# Altium PCB Плата_часов.PcbDoc
Units mm, origin at the board's own origin, x right, y up, seen from the top; angles counter-clockwise.
Board outline 98 x 35 mm, 4 copper layers (Top Layer, Layer 1, Layer 2, Bottom Layer), stack 0.603 mm thick; 69 components, 89 nets, 275 pads, 70 vias.
Unrouted connection lines stored in the file: 53.
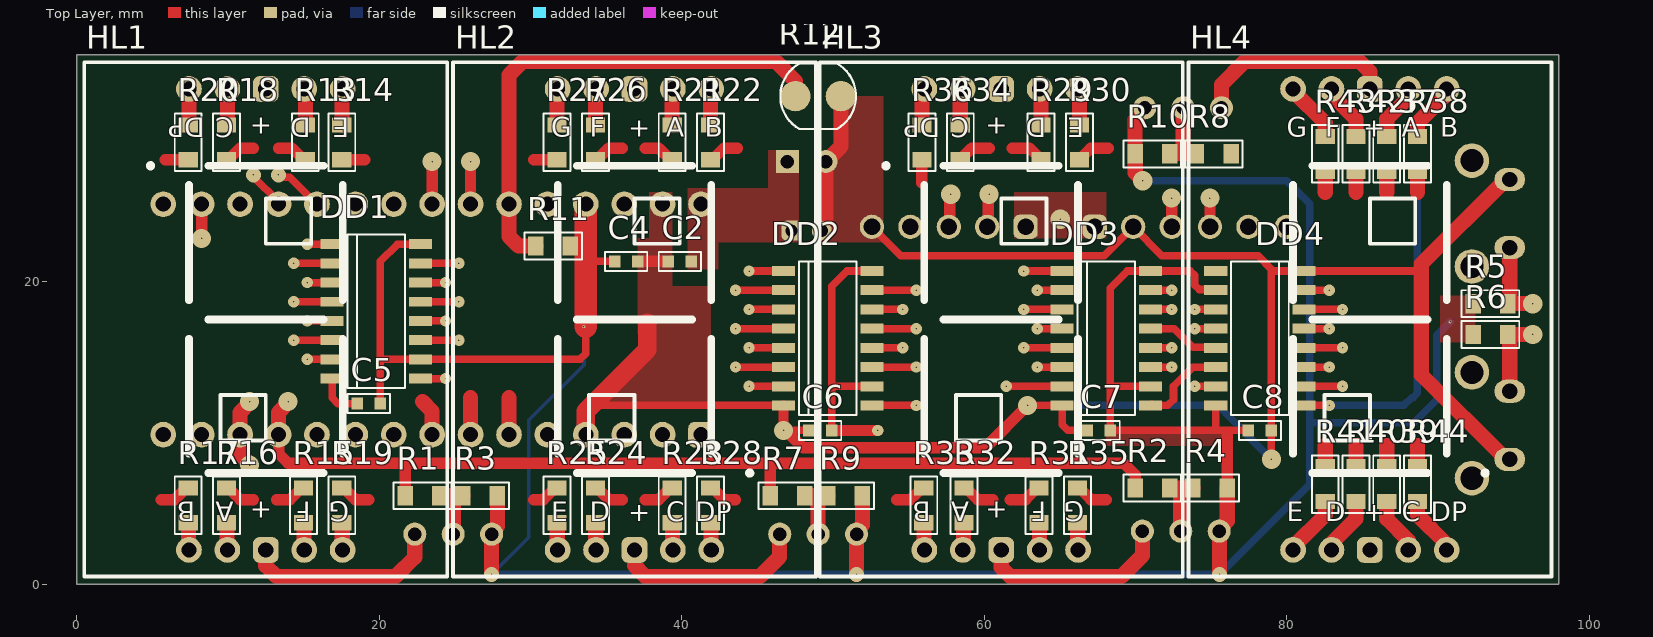
[diagram p0: Top Layer view]
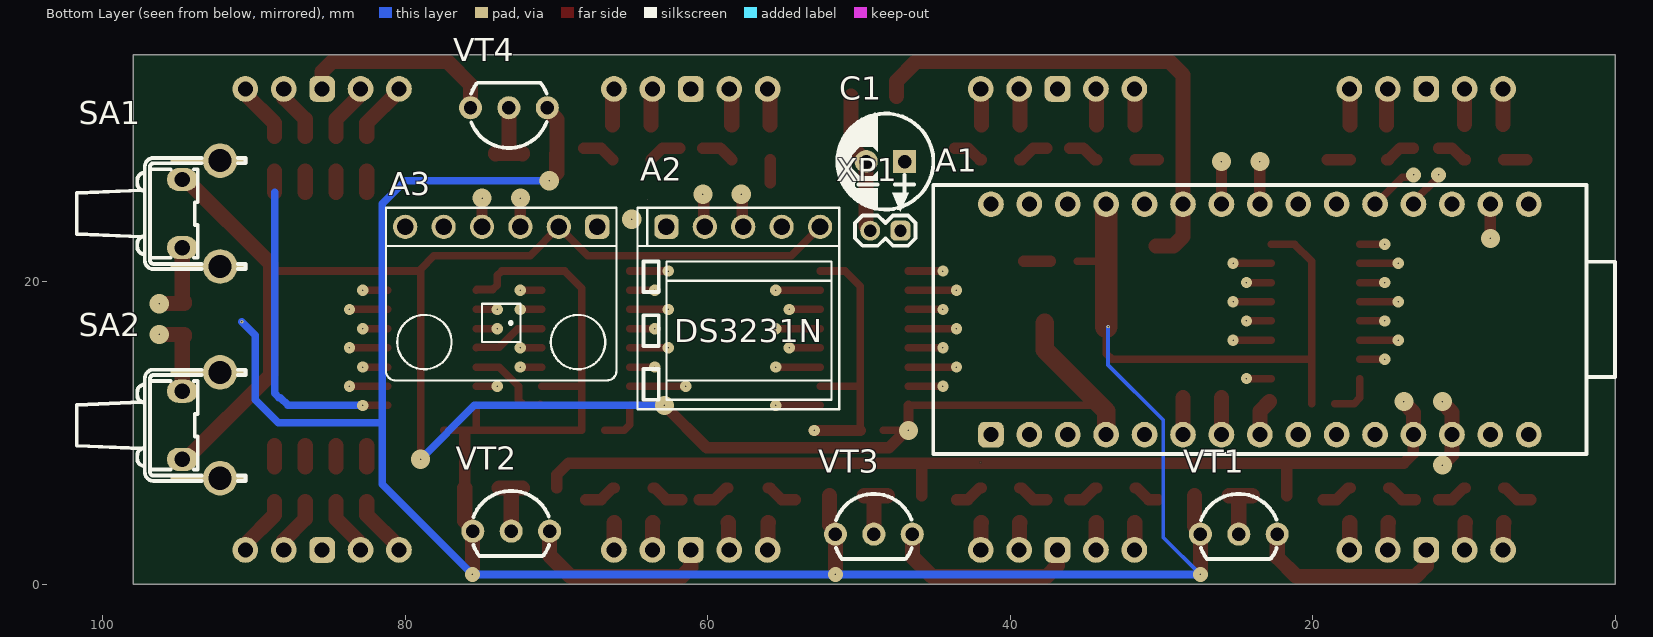
[diagram p1: Bottom Layer view, seen from below]
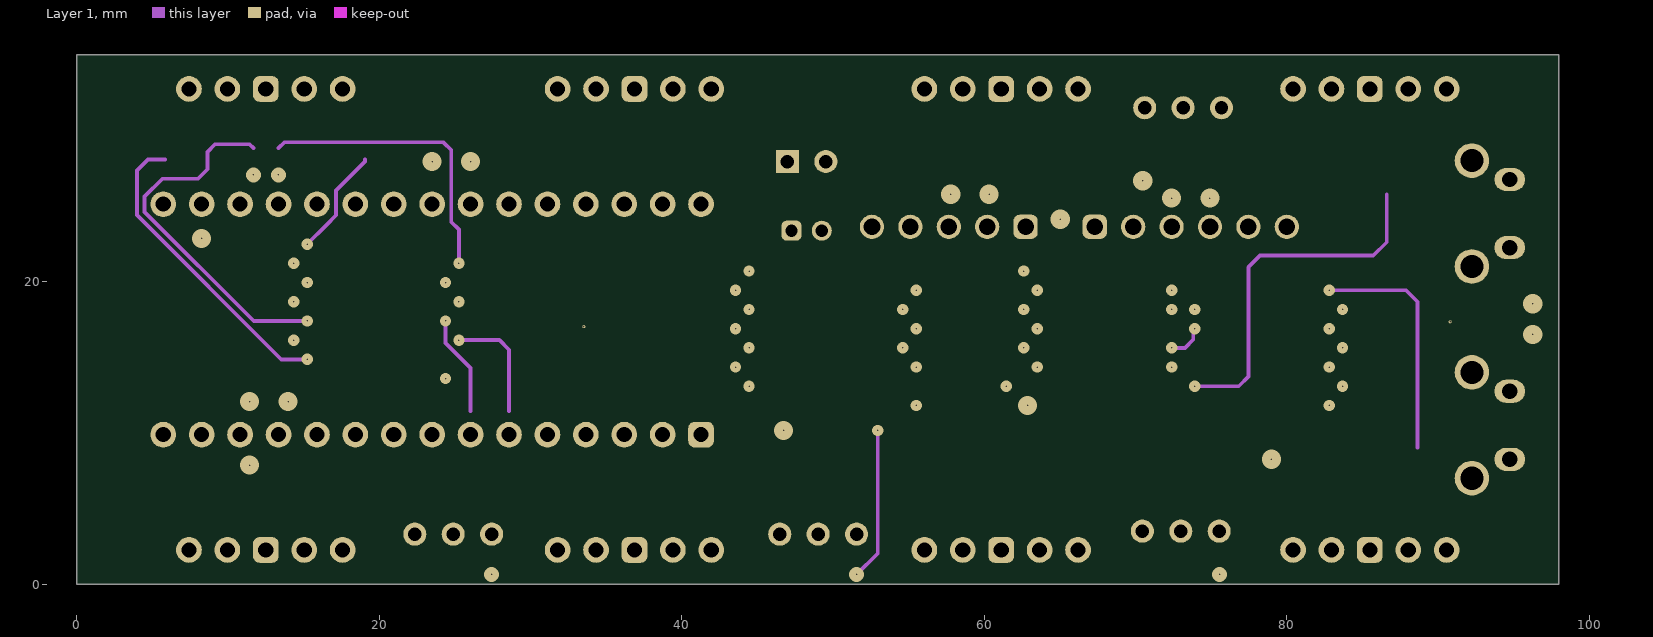
[diagram p2: Layer 1]
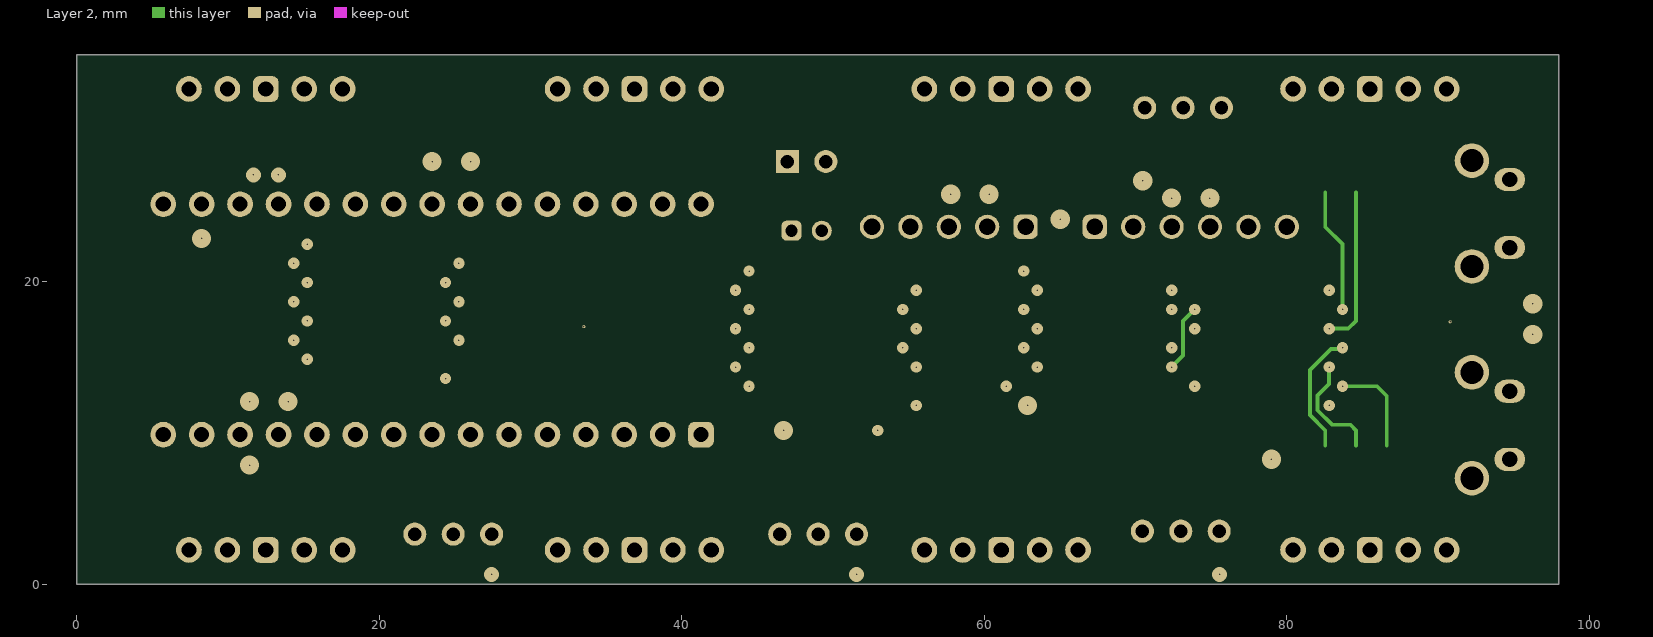
[diagram p3: Layer 2]

## Layer stack, top to bottom
Top Solder: solder mask 0.0102, Solder Resist, Dk 3.5
Top Layer: signal copper 0.0356
Dielectric 2: prepreg 0.0711, PP-006, Dk 4.1
Layer 1: signal copper 0.035
Dielectric 1: dielectric 0.32, FR-4, Dk 4.8
Layer 2: signal copper 0.035
Dielectric 3: prepreg 0.0711, PP-006, Dk 4.1
Bottom Layer: signal copper 0.0356
Bottom Solder: solder mask 0.0102, Solder Resist, Dk 3.5

## Board outline
0,0 98,0 98,35 0,35

## Design rules (kind name [scope] priority, off if disabled: settings)
Clearance [All] p1: gap=0.254 ignorepadtopadclearanceinfootprint=FALSE
ComponentClearance [All] p1: gap=0 collisioncheckmode=3 verticalgap=0 showdistances=FALSE
PolygonConnect [All] p1: connectstyle=Direct reliefconductorwidth=0.254 reliefentries=4 polygonreliefangle="90 Angle" airgapwidth=0.254
RoutingVias [All] p1: holewidth=0.711 width=1.27 viastyle="Through Hole" minholewidth=0.711 minwidth=1.27 maxholewidth=0.711 maxwidth=1.27
SolderMaskExpansion [All] p1: expansion=0 istentingtop=FALSE
SupplyNets "Schematic Supply Nets_3" [InNet('VCC')] p1: voltage=0.000
SupplyNets "Schematic Supply Nets_2" [InNet('+5')] p2: voltage=0.000
SupplyNets "Schematic Supply Nets_1" [InNet('GND')] p3: voltage=0.000
SupplyNets "Schematic Supply Nets" [InNet('+3.3')] p4: voltage=0.000
Width [All] p1: maxlimit=10 minlimit=0.254 preferedwidth=1 midlayer1_maxwidth=0.254 midlayer1_prefwidth=0.254 midlayer2_maxwidth=0.254 midlayer2_prefwidth=0.254 minimp=50.000000 maximp=50.000000 favimp=50.000000
29 further rules are at their usual default settings.

## Components (designator, comment, footprint, x,y, rotation, side; value= is the part's Value field where it differs from the comment)
A1 "Arduino Nano" ArduinoNano 23.5,17.5 r90 bottom locked
A2 "DS3231" DS3231micro 57.658,23.622 r180 bottom locked
A3 "BMP280" BMP280_Module 73.66,23.622 r0 bottom locked
C1 "470uF" CAPAER_D0650_L1150_P0250_W50X300 48.26,27.94 r270 bottom
C2 "1uF" C0603 39.878,21.336 r0 top
C4 "1uF" C0603 36.322,21.336 r180 top
C5 "1uF" C0603 19.304,11.938 r180 top
C6 "1uF" C0603 49.149,10.16 r180 top locked
C7 "1uF" C0603 67.564,10.16 r180 top locked
C8 "1uF" C0603 78.232,10.16 r0 top locked
DD1 "74HC595" SO-16 19.812,18.034 r270 top
DD2 "74HC595" SO-16 49.657,16.256 r270 top locked
DD3 "74HC595" SO-16 68.072,16.256 r270 top locked
DD4 "74HC595" SO-16 78.232,16.256 r90 top locked
HL1 "7S" 7SEG_SA10_21 12.5,17.5 r180 top locked
HL2 "7S" 7SEG_SA10_21 36.875,17.5 r0 top locked
HL3 "7S" 7SEG_SA10_21 61.125,17.5 r180 top locked
HL4 "7S" 7SEG_SA10_21 85.5,17.5 r0 top locked
R1 "510R" R0805 22.86,5.842 r180 top
R2 "510R" R0805 71.12,6.35 r180 top
R3 "33K" R0805 26.67,5.842 r180 top
R4 "33K" R0805 74.93,6.35 r180 top
R5 "33K" R0805 93.472,18.542 r0 top
R6 "33K" R0805 93.472,16.51 r0 top
R7 "510R" R0805 46.99,5.842 r180 top
R8 "510R" R0805 75.184,28.448 r0 top
R9 "33K" R0805 50.8,5.842 r180 top
R10 "33K" R0805 71.12,28.448 r0 top
R11 "10K" R0805 31.496,22.352 r180 top
R12 "GL5516" GL55 49.022,32.258 r0 top
R13 "510R" R0805 15.113,29.21 r270 top
R14 "510R" R0805 17.526,29.21 r270 top
R15 "510R" R0805 14.986,5.207 r90 top
R16 "510R" R0805 9.906,5.207 r90 top
R17 "510R" R0805 7.366,5.207 r90 top
R18 "510R" R0805 9.906,29.21 r270 top
R19 "510R" R0805 17.526,5.207 r90 top
R20 "510R" R0805 7.366,29.21 r270 top
R21 "510R" R0805 39.37,29.21 r270 top
R22 "510R" R0805 41.91,29.21 r270 top
R23 "510R" R0805 39.37,5.207 r90 top
R24 "510R" R0805 34.29,5.207 r90 top
R25 "510R" R0805 31.75,5.207 r90 top
R26 "510R" R0805 34.29,29.21 r270 top
R27 "510R" R0805 31.75,29.21 r270 top
R28 "510R" R0805 41.91,5.207 r90 top
R29 "510R" R0805 63.754,29.21 r270 top
R30 "510R" R0805 66.294,29.21 r270 top
R31 "510R" R0805 63.627,5.207 r90 top
R32 "510R" R0805 58.674,5.207 r90 top
R33 "510R" R0805 56.007,5.207 r90 top
R34 "510R" R0805 58.42,29.21 r270 top
R35 "510R" R0805 66.167,5.207 r90 top
R36 "510R" R0805 55.88,29.21 r270 top
R37 "510R" R0805 86.614,28.448 r270 top
R38 "510R" R0805 88.646,28.448 r270 top
R39 "510R" R0805 86.614,6.604 r90 top
R40 "510R" R0805 84.582,6.604 r90 top
R41 "510R" R0805 82.55,6.604 r90 top
R42 "510R" R0805 84.582,28.448 r270 top
R43 "510R" R0805 82.55,28.448 r270 top
R44 "510R" R0805 88.646,6.604 r90 top
SA1 "" TS6606-9.0 94.75,24.5 r90 bottom locked
SA2 "" TS6606-9.0 94.75,10.5 r90 bottom locked
VT1 "" S8550 24.892,3.302 r180 bottom locked
VT2 "" S8550 73,3.5 r180 bottom locked
VT3 "" S8550 49.022,3.302 r180 bottom locked
VT4 "" S8550 73.152,31.496 r0 bottom locked
XP1 "DS1072-2MVT6" PLS2-2 48.26,23.368 r180 bottom

## Footprints (in the part's own frame and the unit in brackets; to place one, negate y for a bottom-side part, rotate by r counter-clockwise, add the part's x,y. Pads: shape width x height; smd on the part's side, far side on the other; paste and mask are expansions set on the pad)
7SEG_SA10_21 [mm]
  round 1.7 hole 1: 1(2.54,15.24) 2(5.08,15.24) 3(2.54,-15.24) 4(-2.54,-15.24) 5(-5.08,-15.24) 6(-2.54,15.24) 7(-5.08,15.24) 8(5.08,-15.24)
  rrect50% 1.7x1.7 hole 1: 9(0,15.24) 9(0,-15.24)
  silkscreen extent -12,-17 12,17
ArduinoNano [mm]
  rrect50% 1.7x1.7 hole 1: 1(-7.62,17.78)
  round 1.7 hole 1: 2(-7.62,15.24) 3(-7.62,12.7) 4(-7.62,10.16) 5(-7.62,7.62) 6(-7.62,5.08) 7(-7.62,2.54) 8(-7.62,0) 9(-7.62,-2.54) 10(-7.62,-5.08) 11(-7.62,-7.62) 12(-7.62,-10.16) 13(-7.62,-12.7) 14(-7.62,-15.24) 15(-7.62,-17.78) 16(7.62,-17.78) 17(7.62,-15.24) 18(7.62,-12.7) 19(7.62,-10.16) 20(7.62,-7.62) 21(7.62,-5.08) 22(7.62,-2.54) 23(7.62,0) 24(7.62,2.54) 25(7.62,5.08) 26(7.62,7.62) 27(7.62,10.16) 28(7.62,12.7) 29(7.62,15.24) 30(7.62,17.78)
  silkscreen extent -8.89,-23.49 8.89,21.59, body extent -9,-23.4 9,21.6, height 12.6
BMP280_Module [mm]
  rrect50% 1.6x1.6 hole 1.1: 1(-6.35,0)
  round 1.6 hole 1.1: 2(-3.81,0) 3(-1.27,0) 4(1.27,0) 5(3.81,0) 6(6.35,0)
  silkscreen extent -7.62,-1.27 7.62,10.16, body extent -7.62,-1.27 7.62,1.27, height 8.5
C0603 [mil]
  rect 30x32 smd: 1(-30,0) 2(30,0)
  silkscreen extent -55,-25 55,25, body extent -31,-16 32,16, height 31
CAPAER_D0650_L1150_P0250_W50X300 [mil]
  rect 60x60 hole 35: 1(0,50)
  round 60 hole 35: 2(0,-50)
  silkscreen extent -125,-126 125,125, body extent -124,-124 124,124, height 453
DS3231micro [mm]
  rrect50% 1.6x1.6 hole 1.1: 1(-5.08,0)
  round 1.6 hole 1.1: 2(-2.54,0) 3(0,0) 4(2.54,0) 5(5.08,0)
  silkscreen extent -6.99,-12.07 6.35,1.27, body extent -6.35,-1.27 6.35,1.27, height 8.5
GL55 [mm] "Series Photoresistor"
  round 2 smd: 1(-1.5,0) 2(1.5,0)
  silkscreen extent -2.5,-2.17 2.5,2.17
PLS2-2 [mil]
  rrect50% 52x52 hole 32: 1(39.37,0)
  round 52 hole 32: 2(-39.37,0)
  silkscreen extent -79,-39 79,98, body extent -79,-39 79,39, height 236
R0805 [mil]
  rect 40x50 smd: 1(-45,0) 2(45,0)
  silkscreen extent -75,-35 75,35, body extent -40,-25 40,25, height 20
S8550 [mil]
  round 60 hole 35: B(0,0) C(100,0) E(-100,0)
  silkscreen extent -99,-65 99,105, body extent -110,-69 110,85, height 390
SO-16 [mil]
  rect 26x60 smd: 1(-175,-115) 2(-125,-115) 3(-75,-115) 4(-25,-115) 5(25,-115) 6(75,-115) 7(125,-115) 8(175,-115) 9(175,115) 10(125,115) 11(75,115) 12(25,115) 13(-25,115) 14(-75,115) 15(-125,115) 16(-175,115)
  silkscreen extent -200,-75 200,75, body extent -197,-126 197,126, height 73
TS6606-9.0 [mil]
  round 90 hole 60: 0(-137.8,-98.43) 0(137.8,-98.43)
  rect 16x200 smd: 0(-137.8,-70) 0(137.8,-70)
  oval 60x80 hole 40: 1(-88.58,0) 2(88.58,0)
  silkscreen extent -145,-165 145,275, body extent -166,-164 166,278, height 280

## Part data
A1: library part ArduinoNano
A2: library part DS3231micro
A3: library part BMP280_Module
C1: library part CPol
C2 C4 C5 C6 C7 C8: library part C0603, "Ceramic SMT, L*W 1.6x0.8mm, H=(0.8, 0.6)mm"
HL1 HL2 HL3 HL4: library part 7SEG_AN
R1 R2 R3 R4 R5 R6 R7 R8 R9 R10 R11 R13 R14 R15 R16 R17 R18 R19 R20 R21 R22 R23 R24 R25 R26 R27 R28 R29 R30 R31 R32 R33 R34 R35 R36 R37 R38 R39 R40 R41 R42 R43 R44: library part R0805, "SMT, L*W 2.0x1.25mm, H=0.5mm"
R12: library part Photores
SA1 SA2: library part SW
VT1 VT2 VT3 VT4: library part TRANS-PNP, Model=S8550
XP1: "2-pin Straight connector PWL-2", Current=3A, Manufacturer=Connfly, Voltage=250Vac, NET 1=VCC, NET 2=GND, Type=DS1072-2MVT6

## Free pads (board coordinates)
  round 0.2 hole 0.1: 4(90.805,17.345) 5(33.528,17.018)

## Via types
v1: diameter 0.75/0.75/0.75/0.75 (per signal layer), hole 0.1, Top Layer to Bottom Layer, 48 vias
v2: diameter 1.27/1.27/1.27/1.27 (per signal layer), hole 0.1, Top Layer to Bottom Layer, 17 vias
v3: diameter 1/1/1/1 (per signal layer), hole 0.1, Top Layer to Bottom Layer, 5 vias

## Nets (pads, with @x,y where several pads share a name; then routed paths per layer and width w, separated by ;. In a path a pad name is that pad's centre, name@x,y a point inside that pad or via, vN(x,y) a via of type N, cw(c..) or ccw(c..) an arc to the next point about the centre after c; other vN are vias at no path point)
+3.3: A1.17 A2.1 A3.1 | length 2.3
  Top Layer w0.75: v2(8.255,22.86) 8.258,22.863 8.258,25.118 A1.17
  other v2: 65.024,24.13
+5: A1.27 C4.2 C5.1 C6.1 C7.1 C8.1 DD1.10 DD1.16 DD2.10 DD2.16 DD3.10 DD3.16 DD4.10 DD4.16 pad.4 pad.5 R3.1 R4.1 R5.1 R6.1 R9.1 R10.1 R11.1 VT1.E VT2.E VT3.E VT4.E | length 243.7
  Top Layer w0.5: C5.1 20.066,14.859 ; DD1.16 21.209,22.479 20.066,21.336 20.066,14.859 ; 33.66,17.018 33.66,15.245 33.274,14.859 DD1.10 20.066,14.859 ; 33.66,21.336 C4.2 ; C6.1 49.911,13.081 ; DD2.10 49.911,13.081 ; DD2.16 50.927,20.701 49.911,19.685 49.911,13.081 ; DD3.10 68.326,13.081 ; DD4.16 75.311,10.287 75.438,10.16 ; DD4.10 75.262,19.48 74.207,19.48 73.914,19.773 73.914,20.408 73.621,20.701 DD3.16 69.469,20.701 68.326,19.558 68.326,13.081 ; 76.073,10.033 76.2,10.16 ; C8.1 76.2,10.16 ; 68.326,13.081 C7.1 75.438,10.16 ; 75.438,10.16 76.2,10.16
  Top Layer w0.75: C6.1 v1(52.959,10.16) ; R4.1 76.073,10.033
  Top Layer w1: v3(27.432,0.635) VT1.E 27.432,3.444 27.813,3.825 R3.1 ; VT3.E@51.54,3.5 51.943,3.903 R9.1 ; v3(51.562,0.635) VT3.E ; v2(70.485,26.67) 69.985,27.17 69.985,28.44 R10.1 69.977,30.719 70.612,31.354 VT4.E ; v3(75.565,0.635) 75.565,3.475 VT2.E 75.54,3.642 76.073,4.175 R4.1
  Top Layer w1.5: 33.66,17.018 33.66,21.336 A1.27
  Layer 1 w0.254: v3(51.562,0.635) 52.959,2.032 v1(52.959,10.16)
  Bottom Layer w0.254: v3(27.432,0.635) 29.889,3.092 29.889,10.839 33.528,14.478 pad.5
  Bottom Layer w0.5: v3(27.432,0.635) v3(51.562,0.635) v3(75.565,0.635) 81.534,6.604 81.534,10.668 ; v2(70.485,26.67) 80.01,26.67 81.534,25.146 81.534,10.668 ; pad.4 89.916,16.456 89.916,12.192 88.392,10.668 81.534,10.668
BTN_1: A1.19 R5.2 SA1.1 | length 7.9
  Top Layer w0.5: v3(11.684,27.051) 11.684,26.924 13.34,25.268 A1.19
  Top Layer w1: R5.2 v2(96.266,18.542) ; R5.2@94.615,18.669 94.75,18.804 SA1.1
BTN_2: A1.20 R6.2 SA2.2 | length 8.7
  Top Layer w0.5: v3(13.335,27.051) 13.482,26.904 14.096,26.904 A1.20
  Top Layer w1: R6.2@94.615,16.383 94.75,16.248 SA2.2 ; R6.2 v2(96.266,16.51)
CLK: A1.6 DD1.11 DD2.11 DD3.11 DD4.11 | length 22.8
  Top Layer w0.5: DD1.11 v1(25.273,16.129) ; DD2.11 v1(55.499,14.351) ; DD3.11 v1(72.39,14.351) ; v1(73.914,18.161) DD4.11
  Top Layer w1: 28.575,12.319 28.575,9.885 A1.6
  Layer 1 w0.254: v1(25.273,16.129) 27.94,16.129 28.575,15.494 28.575,11.43
  Layer 2 w0.254: v1(72.39,14.351) 73.152,15.113 73.152,17.399 v1(73.914,18.161)
CS: A1.7 DD1.12 DD2.12 DD3.12 DD4.12 | length 18
  Top Layer w0.5: DD1.12 v1(24.384,17.399) ; DD2.12 v1(54.61,15.621) ; DD3.12 v1(72.39,15.621) ; v1(73.914,16.891) DD4.12
  Top Layer w1: A1.7 26.04,12.319
  Layer 1 w0.254: v1(24.384,17.399) 24.384,15.949 26.035,14.298 26.035,11.43 ; v1(72.39,15.621) 73.279,15.621 73.819,16.161 73.819,16.796 v1(73.914,16.891)
DAT: A1.8 DD1.14 | length 4.1
  Top Layer w0.5: DD1.14 v1(24.384,19.939)
  Top Layer w1: 22.858,12.067 23.495,11.43 23.495,9.885 A1.8
GND: A1.4 A1.29 A2.5 A3.2 C1.2 C2.1 C4.1 C5.2 C6.2 C7.2 C8.2 DD1.8 DD2.8 DD3.8 DD4.8 R12.2 SA1.2 SA2.1 XP1.2 | length 154.9
  Top Layer w0.5: DD1.8 16.891,12.319 17.272,11.938 C5.2 ; 34.099,11.875 34.163,11.811 DD2.8 ; 47.371,10.16 C6.2 ; A2.5 54.483,21.717 67.945,21.717 A3.2 71.755,21.717 78.105,21.717 78.994,20.828 78.994,20.701 ; v2(62.865,11.811) DD3.8 65.151,10.541 65.532,10.16 C7.2 ; v2(78.994,8.255) C8.2 78.994,20.701 ; 88.9,21.154 88.447,20.701 DD4.8 78.994,20.701
  Top Layer w0.65: v2(46.736,10.16) DD2.8
  Top Layer w0.75: C4.1@37.338,21.336 C2.1 ; v2(46.736,10.16) 46.877,10.16 48.02,9.017 60.071,9.017 v2(62.865,11.811)
  Top Layer w1: XP1.2 49.53,23.638 C1.2 50.522,28.932 R12.2 ; SA2.1 94.496,8.25 88.9,13.846 88.9,21.154 94.496,26.75 SA1.2
  Top Layer w1.25: A1.4 33.655,9.885 33.655,11.43 34.099,11.875 37.719,15.494 37.719,17.272
  Top Layer w1.5: A1.29@38.74,25.066 A1.29
  Bottom Layer w0.5: v2(62.865,11.811) 75.438,11.811 v2(78.994,8.255)
HL1_A: HL1.1 R16.1 | length 1.8
  Top Layer w1: R16.1 9.925,4.064 9.933,4.056 9.933,2.287 HL1.1
HL1_AN: HL1.9@12.5,2.26 VT1.C | length 13.2
  Top Layer w1: HL1.9@12.5,2.26 12.5,1.216 13.208,0.508 21.082,0.508 22.352,1.778 VT1.C
HL1_B: HL1.2 R17.1 | length 1.8
  Top Layer w1: R17.1 7.385,4.064 7.393,4.056 7.393,2.287 HL1.2
HL1_C: HL1.3 R18.1 | length 2.3
  Top Layer w1: R18.1@9.96,30.407 HL1.3
HL1_D: HL1.4 R13.1 | length 2.4
  Top Layer w1: HL1.4 15.113,32.667 R13.1
HL1_E: HL1.5 R14.1 | length 2.3
  Top Layer w1: R14.1 HL1.5@17.526,32.686
HL1_F: HL1.6 R15.1 | length 1.8
  Top Layer w1: R15.1 15.005,4.064 15.013,4.056 15.013,2.287 HL1.6
HL2_AN: HL2.9@36.875,2.26 VT3.C | length 13.2
  Top Layer w1: HL2.9@36.875,2.26 36.875,1.225 37.592,0.508 45.168,0.508 46.46,1.8 VT3.C@46.46,3.5
HL3_A: HL3.1 R32.1 | length 1.9
  Top Layer w1: HL3.1 58.629,2.304 58.629,4.056 58.637,4.064 R32.1
HL3_AN: HL3.9@61.125,2.26 VT2.C | length 12.9
  Top Layer w1: HL3.9@61.125,2.26 61.125,1.105 61.722,0.508 69.088,0.508 70.46,1.88 VT2.C
HL3_B: HL3.2 R33.1 | length 1.8
  Top Layer w1: R33.1 56.018,4.064 56.026,4.056 56.026,2.279 HL3.2
HL3_C: HL3.3 R34.1 | length 2.2
  Top Layer w1: R34.1 HL3.3@58.42,32.575
HL3_D: HL3.4 R29.1 | length 2.3
  Top Layer w1: R29.1 HL3.4@63.754,32.651
HL3_E: HL3.5 R30.1 | length 2.3
  Top Layer w1: R30.1 HL3.5@66.294,32.651
HL3_F: HL3.6 R31.1 | length 1.8
  Top Layer w1: R31.1 63.638,4.064 63.646,4.056 63.646,2.279 HL3.6
HL4_AN: HL4.9@85.5,32.74 VT4.C | length 13.4
  Top Layer w1: VT4.C 75.692,33.02 77.216,34.544 84.836,34.544 85.5,33.88 HL4.9@85.5,32.74
NetDD1_1: DD1.1 R14.2 | length 10.3
  Top Layer w0.5: v1(15.24,22.479) DD1.1
  Top Layer w0.75: R14.2 19.05,28.067
  Layer 1 w0.254: v1(15.24,22.479) 16.51,23.749 17.145,24.384 17.145,26.035 19.05,27.94 19.05,28.067
NetDD1_2: DD1.2 R15.2 | length 4.6
  Top Layer w0.5: v1(14.351,21.209) DD1.2
  Top Layer w0.75: 13.208,5.588 14.097,5.588 14.859,6.35 R15.2
NetDD1_3: DD1.3 R16.2 | length 3.7
  Top Layer w0.5: v1(15.24,19.939) DD1.3
  Top Layer w0.75: R16.2 10.033,6.35 10.795,5.588 11.684,5.588
NetDD1_4: DD1.4 R17.2 | length 4.6
  Top Layer w0.5: v1(14.351,18.669) DD1.4
  Top Layer w0.75: 5.588,5.588 6.477,5.588 7.239,6.35 R17.2
NetDD1_5: DD1.5 R18.2 | length 27.9
  Top Layer w0.5: v1(15.24,17.399) DD1.5
  Top Layer w0.75: R18.2 10.033,28.067 10.795,28.829 11.684,28.829
  Layer 1 w0.254: 11.684,28.829 11.43,29.083 9.144,29.083 8.636,28.575 8.636,27.432 8.001,26.797 5.656,26.797 4.489,25.63 4.489,24.61 11.7,17.399 v1(15.24,17.399)
NetDD1_6: DD1.6 R19.2 | length 4.6
  Top Layer w0.5: v1(14.351,16.129) DD1.6
  Top Layer w0.75: R19.2 17.653,6.35 18.415,5.588 19.304,5.588
NetDD1_7: DD1.7 R20.2 | length 23.5
  Top Layer w0.5: v1(15.24,14.859) DD1.7
  Top Layer w0.75: 5.842,28.067 R20.2
  Layer 1 w0.254: 5.842,28.067 4.699,28.067 3.981,27.349 3.981,24.4 13.522,14.859 v1(15.24,14.859)
NetDD1_9: DD1.9 DD2.14 | length 3.7
  Top Layer w0.5: DD1.9 v1(24.384,13.589) ; DD2.14 v1(54.61,18.161)
NetDD1_15: DD1.15 R13.2 | length 24.1
  Top Layer w0.5: DD1.15 v1(25.273,21.209)
  Top Layer w0.75: 13.335,28.829 14.224,28.829 14.986,28.067 R13.2
  Layer 1 w0.254: 13.335,28.829 13.716,29.21 24.257,29.21 24.765,28.702 24.765,23.943 25.273,23.435 v1(25.273,21.209)
NetDD2_1: DD2.1 R22.2 | length 4.4
  Top Layer w0.5: v1(44.45,20.701) DD2.1
  Top Layer w0.75: R22.2 42.037,28.067 42.799,28.829 43.688,28.829
NetDD2_2: DD2.2 R23.2 | length 5.3
  Top Layer w0.5: v1(43.561,19.431) DD2.2
  Top Layer w0.75: 37.592,5.588 38.481,5.588 39.243,6.35 R23.2
NetDD2_3: DD2.3 R24.2 | length 4.4
  Top Layer w0.5: v1(44.45,18.161) DD2.3
  Top Layer w0.75: R24.2 34.417,6.35 35.179,5.588 36.068,5.588
NetDD2_4: DD2.4 R25.2 | length 5
  Top Layer w0.5: v1(43.561,16.891) DD2.4
  Top Layer w0.75: 30.226,5.588 30.861,5.588 31.623,6.35 R25.2
NetDD2_5: DD2.5 R26.2 | length 4.4
  Top Layer w0.5: v1(44.45,15.621) DD2.5
  Top Layer w0.75: R26.2 34.417,28.067 35.179,28.829 36.068,28.829
NetDD2_6: DD2.6 R27.2 | length 4.7
  Top Layer w0.5: v1(43.561,14.351) DD2.6
  Top Layer w0.75: 30.226,28.067 R27.2
NetDD2_7: DD2.7 R28.2 | length 4.3
  Top Layer w0.5: v1(44.45,13.081) DD2.7
  Top Layer w0.75: R28.2 42.037,6.35 42.799,5.588 43.561,5.588
NetDD2_9: DD2.9 DD3.14 | length 4.3
  Top Layer w0.5: DD2.9 v1(55.499,11.811) ; DD3.14 v1(72.39,18.161)
NetDD2_15: DD2.15 R21.2 | length 5
  Top Layer w0.5: DD2.15 v1(55.499,19.431)
  Top Layer w0.75: 37.592,28.829 38.481,28.829 39.243,28.067 R21.2
NetDD3_1: DD3.1 R30.2 | length 4.8
  Top Layer w0.5: v1(62.611,20.701) DD3.1
  Top Layer w0.75: R30.2 67.056,28.829 68.199,28.829
NetDD3_2: DD3.2 R31.2 | length 3.9
  Top Layer w0.5: v1(63.5,19.431) DD3.2
  Top Layer w0.75: 61.722,5.588 62.738,5.588 63.5,6.35 R31.2
NetDD3_3: DD3.3 R32.2 | length 4.8
  Top Layer w0.5: v1(62.611,18.161) DD3.3
  Top Layer w0.75: R32.2 58.801,6.35 59.563,5.588 60.579,5.588
NetDD3_4: DD3.4 R33.2 | length 3.7
  Top Layer w0.5: v1(63.5,16.891) DD3.4
  Top Layer w0.75: 54.229,5.588 55.118,5.588 55.88,6.35 R33.2
NetDD3_5: DD3.5 R34.2 | length 4.8
  Top Layer w0.5: v1(62.611,15.621) DD3.5
  Top Layer w0.75: R34.2 59.182,28.829 60.325,28.829
NetDD3_6: DD3.6 R35.2 | length 3.9
  Top Layer w0.5: v1(63.5,14.351) DD3.6
  Top Layer w0.75: R35.2 66.294,6.35 67.056,5.588 68.072,5.588
NetDD3_7: DD3.7 R36.2 | length 5.2
  Top Layer w0.5: v1(61.468,13.081) DD3.7
  Top Layer w0.75: 55.88,26.543 R36.2
NetDD3_9: DD3.9 DD4.14 | length 6
  Top Layer w0.5: DD3.9@71.073,11.891 DD3.9 72.136,11.811 72.517,12.192 72.517,13.081 73.787,14.351 DD4.14
NetDD3_15: DD3.15 R29.2 | length 3.6
  Top Layer w0.5: DD3.15 v1(72.39,19.431)
  Top Layer w0.75: 61.849,28.829 62.992,28.829 R29.2
NetDD4_1: DD4.1 R38.2 | length 22.5
  Top Layer w0.5: DD4.1 v1(82.804,11.811)
  Top Layer w1: 88.646,25.908 R38.2
  Bottom Layer w0.5: v1(82.804,11.811) 87.757,11.811 88.265,12.319 88.353,12.319 88.646,12.612 88.646,25.908
NetDD4_2: DD4.2 R39.2 | length 10.4
  Top Layer w0.5: DD4.2 v1(83.693,13.081)
  Top Layer w1: R39.2 86.614,9.144
  Layer 2 w0.254: v1(83.693,13.081) 85.979,13.081 86.614,12.446 86.614,9.144
NetDD4_3: DD4.3 R40.2 | length 10.3
  Top Layer w0.5: DD4.3 v1(82.804,14.351)
  Top Layer w1: R40.2 84.582,9.144
  Layer 2 w0.254: v1(82.804,14.351) 82.804,13.235 82.048,12.479 82.048,11.498 83.005,10.541 84.201,10.541 84.582,10.16 84.582,9.144
NetDD4_4: DD4.4 R41.2 | length 12.1
  Top Layer w0.5: DD4.4 v1(83.693,15.621)
  Top Layer w1: R41.2 82.55,9.144
  Layer 2 w0.254: 82.55,9.144 82.55,10.16 81.54,11.17 81.54,14.156 82.937,15.553 83.625,15.553 v1(83.693,15.621)
NetDD4_5: DD4.5 R42.2 | length 13.5
  Top Layer w0.5: DD4.5 v1(82.804,16.891)
  Top Layer w1: 84.582,25.908 R42.2
  Layer 2 w0.254: v1(82.804,16.891) 84.074,16.891 84.582,17.399 84.582,25.908
NetDD4_6: DD4.6 R43.2 | length 12.2
  Top Layer w0.5: DD4.6 v1(83.693,18.161)
  Top Layer w1: 82.55,25.908 R43.2
  Layer 2 w0.254: 82.55,25.908 82.55,23.622 83.693,22.479 v1(83.693,18.161)
NetDD4_7: DD4.7 R44.2 | length 18.9
  Top Layer w0.5: DD4.7 v1(82.804,19.431)
  Top Layer w1: R44.2 88.646,9.144
  Layer 1 w0.254: v1(82.804,19.431) 87.884,19.431 88.646,18.669 88.646,9.017
NetDD4_15: DD4.15 R37.2 | length 26.9
  Top Layer w0.5: v1(73.914,13.081) DD4.15
  Top Layer w1: 86.614,25.908 R37.2
  Layer 1 w0.254: v1(73.914,13.081) 76.835,13.081 77.47,13.716 77.47,20.955 78.232,21.717 85.725,21.717 86.614,22.606 86.614,25.781
NetHL1_7: HL1.7 R19.1 | length 1.8
  Top Layer w1: R19.1 17.545,4.064 17.553,4.056 HL1.7@17.553,2.26
NetHL1_8: HL1.8 R20.1 | length 2.3
  Top Layer w1: R20.1@7.42,30.407 HL1.8
NetHL2_1: HL2.1 R21.1 | length 2.3
  Top Layer w1: R21.1 HL2.1@39.37,32.695
NetHL2_2: HL2.2 R22.1 | length 2.3
  Top Layer w1: R22.1 HL2.2@41.91,32.695
NetHL2_3: HL2.3 R23.1 | length 1.8
  Top Layer w1: R23.1 39.385,4.064 39.393,4.056 39.393,2.282 HL2.3
NetHL2_4: HL2.4 R24.1 | length 1.8
  Top Layer w1: R24.1 34.305,4.064 34.313,4.056 34.313,2.282 HL2.4
NetHL2_5: HL2.5 R25.1 | length 1.8
  Top Layer w1: R25.1 31.765,4.064 31.773,4.056 31.773,2.282 HL2.5
NetHL2_6: HL2.6 R26.1 | length 2.3
  Top Layer w1: R26.1 HL2.6@34.29,32.695
NetHL2_7: HL2.7 R27.1 | length 2.3
  Top Layer w1: R27.1 HL2.7@31.75,32.695
NetHL2_8: HL2.8 R28.1 | length 1.8
  Top Layer w1: R28.1 41.925,4.064 41.933,4.056 41.933,2.282 HL2.8
NetHL3_7: HL3.7 R35.1 | length 1.8
  Top Layer w1: R35.1 66.178,4.064 66.186,4.056 66.186,2.279 HL3.7
NetHL3_8: HL3.8 R36.1 | length 2.2
  Top Layer w1: R36.1 HL3.8@55.88,32.575
NetHL4_1: HL4.1 R37.1 | length 3.2
  Top Layer w1: R37.1 86.614,30.734 HL4.1@88.04,32.16
NetHL4_2: HL4.2 R38.1 | length 3.6
  Top Layer w1: R38.1 88.646,30.48 HL4.2@90.58,32.414
NetHL4_3: HL4.3 R39.1 | length 3.2
  Top Layer w1: R39.1 86.614,4.318 HL4.3@88.04,2.892
NetHL4_4: HL4.4 R40.1 | length 3.4
  Top Layer w1: HL4.4@82.96,2.696 84.582,4.318 R40.1
NetHL4_5: HL4.5 R41.1 | length 3.9
  Top Layer w1: HL4.5@80.42,2.442 82.55,4.572 R41.1
NetHL4_6: HL4.6 R42.1 | length 3.4
  Top Layer w1: HL4.6@82.96,32.356 84.582,30.734 R42.1
NetHL4_7: HL4.7 R43.1 | length 3.9
  Top Layer w1: HL4.7@80.42,32.61 82.55,30.48 R43.1
NetHL4_8: HL4.8 R44.1 | length 3.6
  Top Layer w1: R44.1 88.646,4.572 HL4.8@90.58,2.638
NetR1_1: R1.1 R3.2 VT1.B | length 4.1
  Top Layer w1: R1.1 24.892,5.842 ; VT1.B 24.892,5.842 ; R3.2 24.892,5.842
NetR2_1: R2.1 R4.2 VT2.B | length 4.3
  Top Layer w1: R2.1 R4.2 ; VT2.B 73,6.248
NetR7_1: R7.1 R9.2 VT3.B | length 3.8
  Top Layer w1: R7.1 R9.2 ; VT3.B@49,3.5 49,5.82
NetR8_1: R8.1 R10.2 VT4.B | length 4.9
  Top Layer w1: R10.2 72.263,28.479 72.271,28.487 74.033,28.487 74.041,28.479 R8.1 ; 73.152,28.487 VT4.B
OE: A1.13 DD1.13 DD2.13 DD3.13 DD4.13 | length 15.1
  Top Layer w0.5: DD1.13 v1(25.273,18.669) ; DD2.13 v1(55.499,16.891) ; DD3.13 72.557,16.891 73.799,15.649 75.283,15.649 DD4.13
  Top Layer w0.75: v2@11.43,11.996 v2(11.43,12.065)
  Top Layer w1: v2(11.43,7.874) 11.43,7.947 10.795,8.582 10.795,9.875 A1.13 10.795,9.885 10.795,11.357 11.43,11.992 v2(11.43,12.065)
PHOTO: A1.25 R11.2 R12.1 | length 33.5
  Top Layer w1: R11.2 29.21,22.352 28.58,22.982 A1.25 28.58,33.66 29.464,34.544 46.228,34.544 47.522,33.25 R12.1
PWM: A1.12 R1.2 R2.2 R7.2 R8.2 | length 66.1
  Top Layer w0.75: A1.12 13.362,9.858 13.362,8.609 13.97,8.001 21.709,8.001 ; R1.2 21.709,5.85 21.709,8.001 ; R7.2 45.847,8.001 ; R2.2 69.977,7.239 69.215,8.001 45.847,8.001 ; 21.709,8.001 45.847,8.001
  Top Layer w1: A1.12 13.335,9.885 13.335,11.357 13.97,11.992 v2(13.97,12.065)
SCL: A1.24 A2.3 A3.3 | length 6.9
  Top Layer w0.75: v2(26.035,27.94) 26.038,27.937 26.038,25.122 A1.24 ; A2.3 57.722,23.686 57.722,25.718 v2(57.785,25.781) ; A3.3 v2(72.39,25.527)
SDA: A1.23 A2.2 A3.4 | length 6.9
  Top Layer w0.75: v2(23.495,27.94) 23.498,27.937 23.498,25.122 A1.23 ; A2.2 60.262,23.686 60.262,25.718 v2(60.325,25.781) ; A3.4 v2(74.93,25.527)
VCC: A1.30 C1.1 C2.2 XP1.1
pads on no net: A1.1 A1.2 A1.3 A1.5 A1.9 A1.10 A1.11 A1.14 A1.15 A1.16 A1.18 A1.21 A1.22 A1.26 A1.28 A2.4 A3.5 A3.6 DD4.9 HL1.9@12.5,32.74 HL2.9@36.875,32.74 HL3.9@61.125,32.74 HL4.9@85.5,2.26 SA1.0 SA2.0
copper on no net: | length 2.9
  Top Layer w1: 80.42,2.26 80.42,2.442 ; 82.96,2.26 82.96,2.696 ; 82.96,32.356 82.96,32.74 ; 88.04,2.26 88.04,2.892 ; 88.04,32.16 88.04,32.74 ; 90.58,2.26 90.58,2.638 ; 90.58,32.414 90.58,32.74

## Polygon pours and split planes (outlines as drawn)
GND on Top Layer "GND_L01_P008" (solid, pour order 8): 41.91,19.685 41.91,11.811 34.163,11.811 34.163,11.938 37.846,15.621 37.846,19.685
+5 on Top Layer "+5_L01_P007" (solid, pour order 7): 92.456,19.05 92.456,16.002 90.17,16.002 90.17,19.05
+5 on Top Layer "+5_L01_P006" (solid, pour order 6): 68.072,10.16 76.2,10.16 76.2,9.144 68.072,9.144
GND on Top Layer "GND_L01_P003" (solid, pour order 3): 50.522,32.258 53.34,32.258 53.34,22.606 49.022,22.606 49.022,27.432 50.522,28.932
GND on Top Layer "GND_L01_P002" (solid, pour order 2): 37.846,25.908 39.37,25.908 39.37,16.51 37.084,16.51 37.084,22.86 37.846,22.86
+3.3 on Top Layer "+3.3_L01_P001" (solid, pour order 1): 61.976,25.908 68.072,25.908 68.072,22.86 61.976,22.86
VCC on Top Layer "VCC_L01_P000" (solid, pour order 0): 45.72,28.702 47.752,28.702 47.752,22.606 42.418,22.606 42.418,20.828 40.386,20.828 40.386,26.162 45.72,26.162

## Silkscreen, mask and mechanical layers (free items; w line width, h text height)
Mechanical 1:
  the board outline again, w0.254

## Text inside footprints (layer, text, board x,y; h text height)
A2: Bottom Overlay "DS3231N" at 62.23,16.002 h1.52
HL1: Top Overlay "A" at 10.383,5.435 h1.27 r180; Top Overlay "B" at 7.843,5.435 h1.27 r180; Top Overlay "C" at 10.383,30.835 h1.27 r180; Top Overlay "D" at 15.463,30.835 h1.27 r180; Top Overlay "E" at 18.003,30.835 h1.27 r180; Top Overlay "F" at 15.463,5.435 h1.27 r180; Top Overlay "G" at 18.003,5.435 h1.27 r180; Top Overlay "DP" at 8.478,30.835 h1.27 r180; Top Overlay "+" at 12.923,5.435 h1.27 r180; Top Overlay "+" at 12.923,30.835 h1.27 r180
HL2: Top Overlay "A" at 38.992,29.565 h1.27; Top Overlay "B" at 41.532,29.565 h1.27; Top Overlay "C" at 38.992,4.165 h1.27; Top Overlay "D" at 33.912,4.165 h1.27; Top Overlay "E" at 31.372,4.165 h1.27; Top Overlay "F" at 33.912,29.565 h1.27; Top Overlay "G" at 31.372,29.565 h1.27; Top Overlay "DP" at 40.897,4.165 h1.27; Top Overlay "+" at 36.452,29.565 h1.27; Top Overlay "+" at 36.452,4.165 h1.27
HL3: Top Overlay "+" at 61.548,30.835 h1.27 r180; Top Overlay "+" at 61.548,5.435 h1.27 r180; Top Overlay "DP" at 57.103,30.835 h1.27 r180; Top Overlay "G" at 66.628,5.435 h1.27 r180; Top Overlay "F" at 64.088,5.435 h1.27 r180; Top Overlay "E" at 66.628,30.835 h1.27 r180; Top Overlay "D" at 64.088,30.835 h1.27 r180; Top Overlay "C" at 59.008,30.835 h1.27 r180; Top Overlay "B" at 56.468,5.435 h1.27 r180; Top Overlay "A" at 59.008,5.435 h1.27 r180
HL4: Top Overlay "+" at 85.077,4.165 h1.27; Top Overlay "+" at 85.077,29.565 h1.27; Top Overlay "DP" at 89.522,4.165 h1.27; Top Overlay "G" at 79.997,29.565 h1.27; Top Overlay "F" at 82.537,29.565 h1.27; Top Overlay "E" at 79.997,4.165 h1.27; Top Overlay "D" at 82.537,4.165 h1.27; Top Overlay "C" at 87.617,4.165 h1.27; Top Overlay "B" at 90.157,29.565 h1.27; Top Overlay "A" at 87.617,29.565 h1.27